# EAGLE board controller01_potboard (EAGLE 9.6.2)
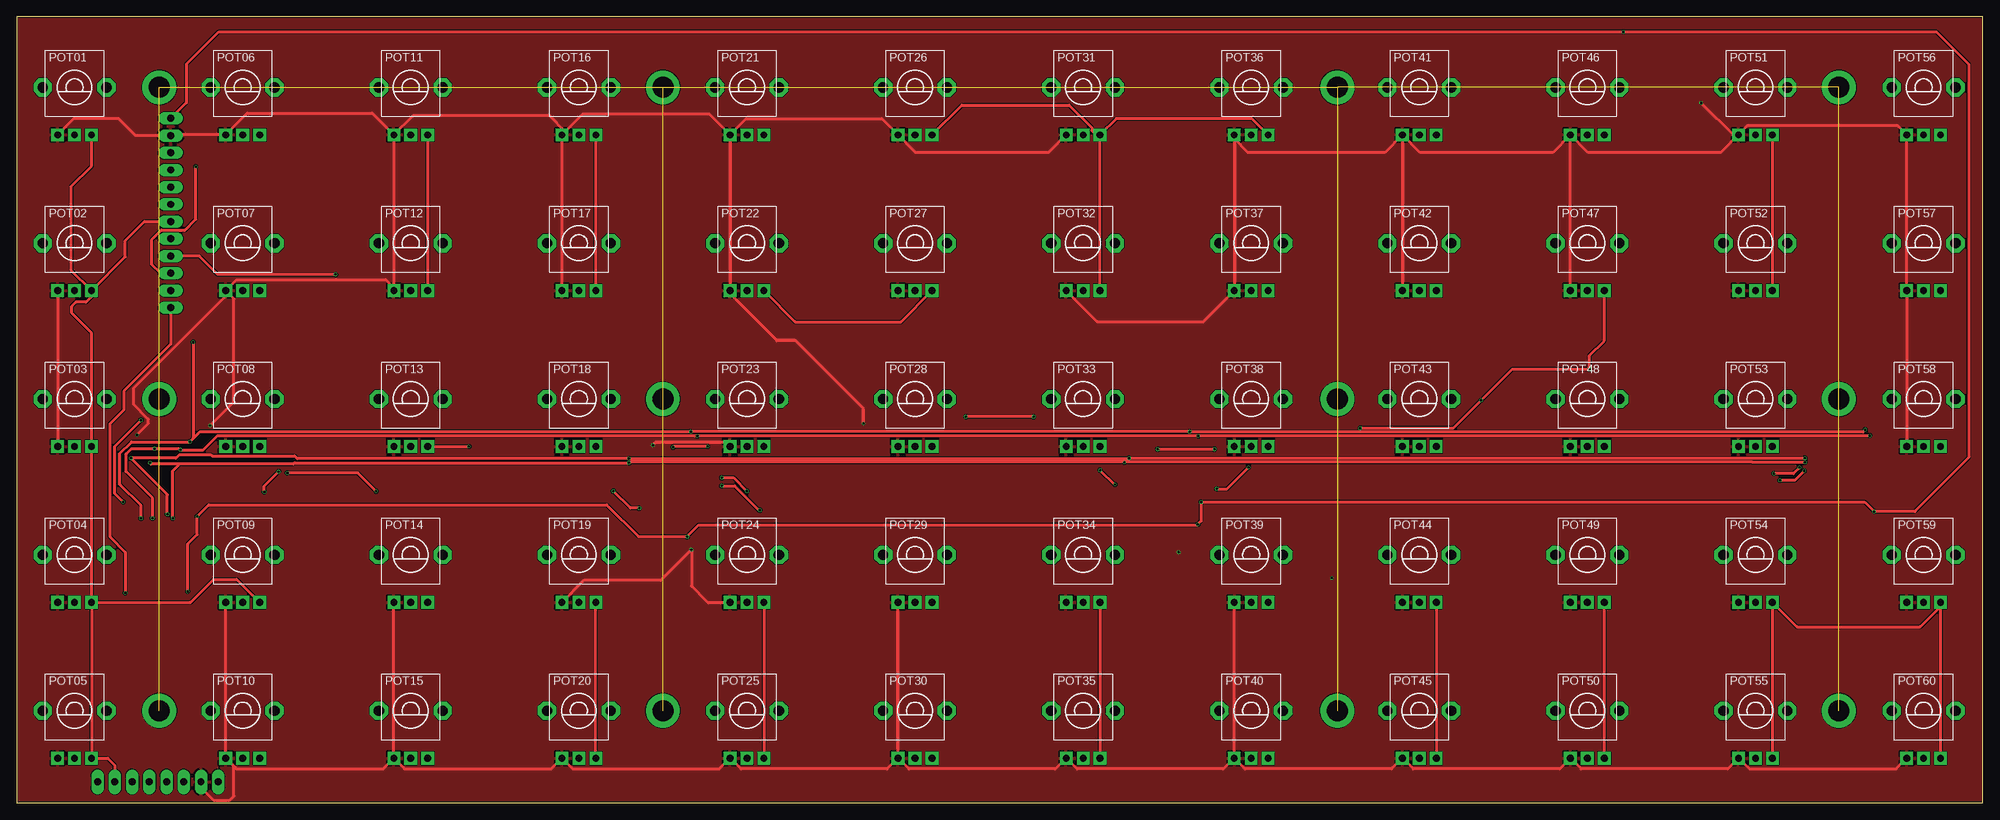
[diagram p0: board, top side]
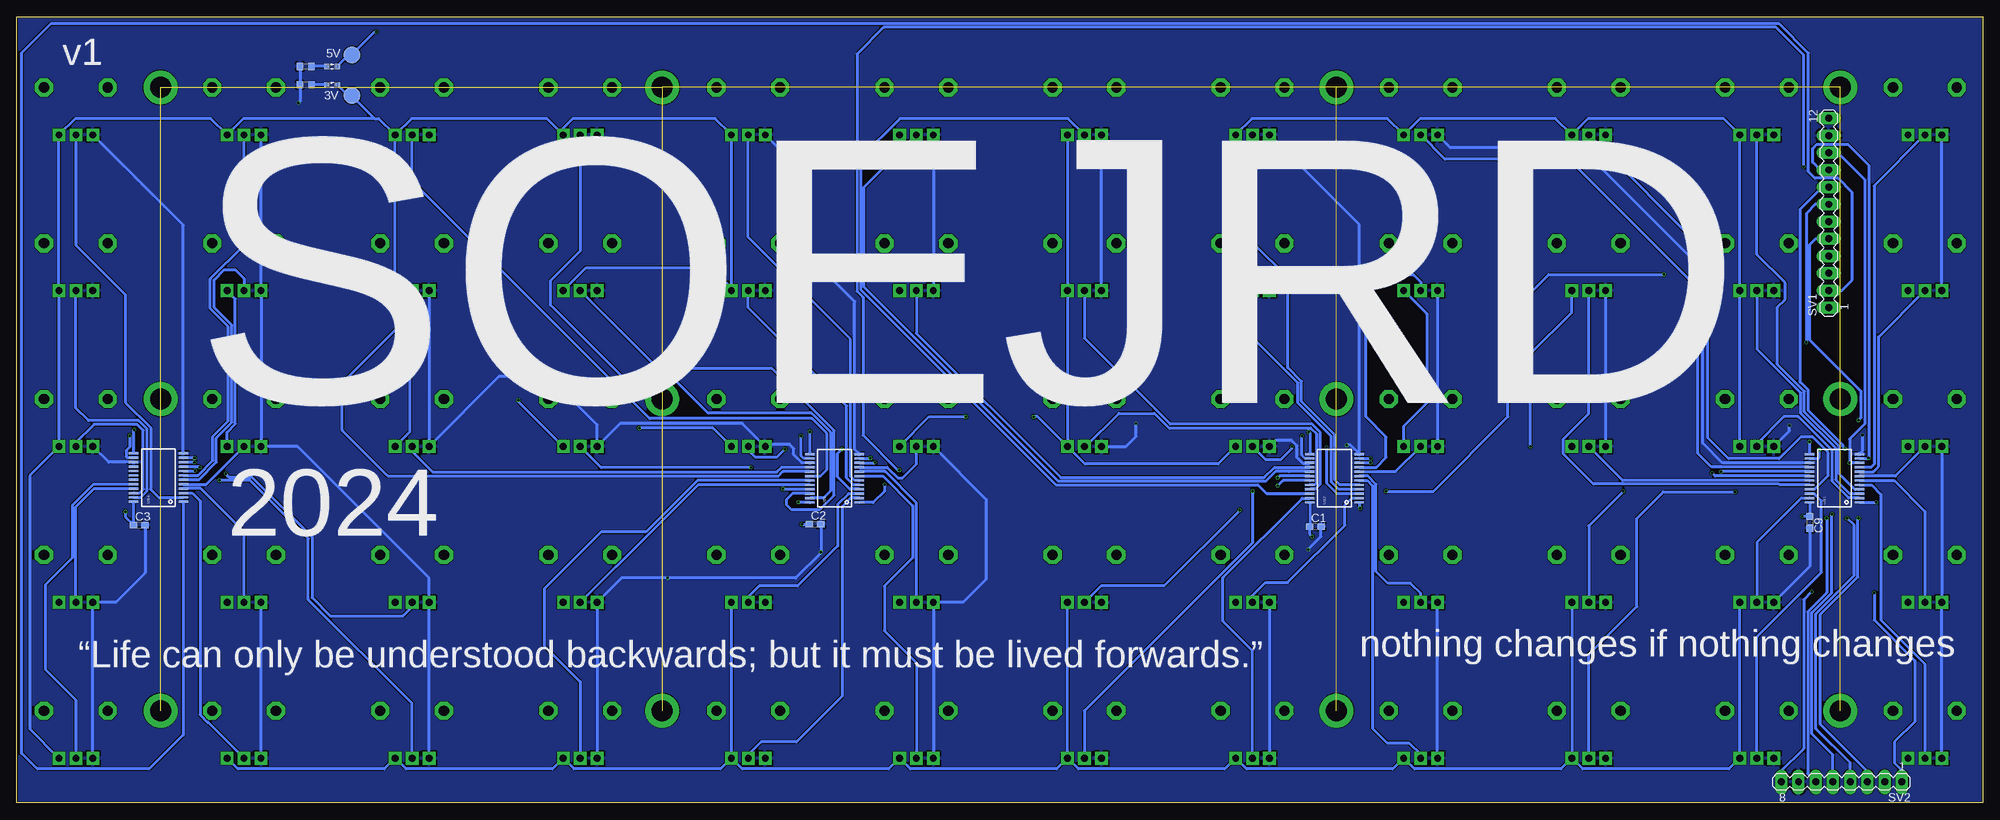
[diagram p1: board, bottom side, seen from below]

Size 290 x 116 mm. Coordinates in mm from the lower left corner, seen from the top.
Outline: 0,0 290,0 290,116 0,116 0,0
Copper layers (1*16): Top 0.035mm / dielectric 1.6mm / Bottom 0.035mm
Design rules "jlcpcb-2layers": minimum track width 5mil, minimum drill 0.3mm, track to track 5mil, track to pad 5mil, pad to pad 5mil, via to via 5mil, smd to smd 5mil, copper to edge 0.2mm, drill to drill 6mil, minimum pad ring 10mil, minimum via ring 3mil, stop-mask expansion 4mil, vias tented up to drill 0mil, thermal gap 10mil

## Footprints (pad centres in the part's own frame; a part is rotated, then mirrored left to right if it is on the bottom)
SML0603 = smd 0.8 x 0.8: A 0.75,0; C -0.75,0
C0603 = smd 1.1 x 1: 1 -0.85,0; 2 0.85,0
ALPS_POT_VERTICAL_PS = drill 1 pad 1.88 square: P$1 -2.5,7; P$2 0,7; P$3 2.5,7 | drill 1.5 pad 2.54 octagon: P$4 -4.7,0; P$5 4.7,0
R0603 = smd 1 x 1.1: 1 -0.85,0; 2 0.85,0
MA12-1 = drill 1.016 long: 1 -13.97,0; 2 -11.43,0; 3 -8.89,0; 4 -6.35,0; 5 -3.81,0; 6 -1.27,0; 7 1.27,0; 8 3.81,0; 9 6.35,0; 10 8.89,0; 11 11.43,0; 12 13.97,0
MA08-1 = drill 1.016 long: 1 -8.89,0; 2 -6.35,0; 3 -3.81,0; 4 -1.27,0; 5 1.27,0; 6 3.81,0; 7 6.35,0; 8 8.89,0
B2,54 = smd 2.54 x 2.54: TP 0,0
SSOP24 = smd 0.348 x 1.397: 1 -3.575,-3.656; 2 -2.925,-3.656; 3 -2.275,-3.656; 4 -1.625,-3.656; 5 -0.975,-3.656; 6 -0.325,-3.656; 7 0.325,-3.656; 8 0.975,-3.656; 9 1.625,-3.656; 10 2.275,-3.656; 11 2.925,-3.656; 12 3.575,-3.656; 13 3.575,3.656; 14 2.925,3.656; 15 2.275,3.656; 16 1.625,3.656; 17 0.975,3.656; 18 0.325,3.656; 19 -0.325,3.656; 20 -0.975,3.656; 21 -1.625,3.656; 22 -2.275,3.656; 23 -2.925,3.656; 24 -3.575,3.656

## Placement (x,y rotation side)
3V  [SML0603]  243.5,106 0 bottom
5V  [SML0603]  243.5,108.7 0 bottom
C1  100n  [C0603]  98.43,40.78 0 bottom
C2  100n  [C0603]  172.23,41.14 0 bottom
C3  100n  [C0603]  271.93,41 0 bottom
C9  100n  [C0603]  25.48,41.43 270 bottom
POT01  10kB  [ALPS_POT_VERTICAL_PS]  8.5,105.6 180 top
POT02  10kB  [ALPS_POT_VERTICAL_PS]  8.5,82.6 180 top
POT03  10kB  [ALPS_POT_VERTICAL_PS]  8.5,59.6 180 top
POT04  10kB  [ALPS_POT_VERTICAL_PS]  8.5,36.6 180 top
POT05  10kB  [ALPS_POT_VERTICAL_PS]  8.5,13.6 180 top
POT06  10kB  [ALPS_POT_VERTICAL_PS]  33.3,105.6 180 top
POT07  10kB  [ALPS_POT_VERTICAL_PS]  33.3,82.6 180 top
POT08  10kB  [ALPS_POT_VERTICAL_PS]  33.3,59.6 180 top
POT09  10kB  [ALPS_POT_VERTICAL_PS]  33.3,36.6 180 top
POT10  10kB  [ALPS_POT_VERTICAL_PS]  33.3,13.6 180 top
POT11  10kB  [ALPS_POT_VERTICAL_PS]  58.1,105.6 180 top
POT12  10kB  [ALPS_POT_VERTICAL_PS]  58.1,82.6 180 top
POT13  10kB  [ALPS_POT_VERTICAL_PS]  58.1,59.6 180 top
POT14  10kB  [ALPS_POT_VERTICAL_PS]  58.1,36.6 180 top
POT15  10kB  [ALPS_POT_VERTICAL_PS]  58.1,13.6 180 top
POT16  10kB  [ALPS_POT_VERTICAL_PS]  82.9,105.6 180 top
POT17  10kB  [ALPS_POT_VERTICAL_PS]  82.9,82.6 180 top
POT18  10kB  [ALPS_POT_VERTICAL_PS]  82.9,59.6 180 top
POT19  10kB  [ALPS_POT_VERTICAL_PS]  82.9,36.6 180 top
POT20  10kB  [ALPS_POT_VERTICAL_PS]  82.9,13.6 180 top
POT21  10kB  [ALPS_POT_VERTICAL_PS]  107.7,105.6 180 top
POT22  10kB  [ALPS_POT_VERTICAL_PS]  107.7,82.6 180 top
POT23  10kB  [ALPS_POT_VERTICAL_PS]  107.7,59.6 180 top
POT24  10kB  [ALPS_POT_VERTICAL_PS]  107.7,36.6 180 top
POT25  10kB  [ALPS_POT_VERTICAL_PS]  107.7,13.6 180 top
POT26  10kB  [ALPS_POT_VERTICAL_PS]  132.5,105.6 180 top
POT27  10kB  [ALPS_POT_VERTICAL_PS]  132.5,82.6 180 top
POT28  10kB  [ALPS_POT_VERTICAL_PS]  132.5,59.6 180 top
POT29  10kB  [ALPS_POT_VERTICAL_PS]  132.5,36.6 180 top
POT30  10kB  [ALPS_POT_VERTICAL_PS]  132.5,13.6 180 top
POT31  10kB  [ALPS_POT_VERTICAL_PS]  157.3,105.6 180 top
POT32  10kB  [ALPS_POT_VERTICAL_PS]  157.3,82.6 180 top
POT33  10kB  [ALPS_POT_VERTICAL_PS]  157.3,59.6 180 top
POT34  10kB  [ALPS_POT_VERTICAL_PS]  157.3,36.6 180 top
POT35  10kB  [ALPS_POT_VERTICAL_PS]  157.3,13.6 180 top
POT36  10kB  [ALPS_POT_VERTICAL_PS]  182.1,105.6 180 top
POT37  10kB  [ALPS_POT_VERTICAL_PS]  182.1,82.6 180 top
POT38  10kB  [ALPS_POT_VERTICAL_PS]  182.1,59.6 180 top
POT39  10kB  [ALPS_POT_VERTICAL_PS]  182.1,36.6 180 top
POT40  10kB  [ALPS_POT_VERTICAL_PS]  182.1,13.6 180 top
POT41  10kB  [ALPS_POT_VERTICAL_PS]  206.9,105.6 180 top
POT42  10kB  [ALPS_POT_VERTICAL_PS]  206.9,82.6 180 top
POT43  10kB  [ALPS_POT_VERTICAL_PS]  206.9,59.6 180 top
POT44  10kB  [ALPS_POT_VERTICAL_PS]  206.9,36.6 180 top
POT45  10kB  [ALPS_POT_VERTICAL_PS]  206.9,13.6 180 top
POT46  10kB  [ALPS_POT_VERTICAL_PS]  231.7,105.6 180 top
POT47  10kB  [ALPS_POT_VERTICAL_PS]  231.7,82.6 180 top
POT48  10kB  [ALPS_POT_VERTICAL_PS]  231.7,59.6 180 top
POT49  10kB  [ALPS_POT_VERTICAL_PS]  231.7,36.6 180 top
POT50  10kB  [ALPS_POT_VERTICAL_PS]  231.7,13.6 180 top
POT51  10kB  [ALPS_POT_VERTICAL_PS]  256.5,105.6 180 top
POT52  10kB  [ALPS_POT_VERTICAL_PS]  256.5,82.6 180 top
POT53  10kB  [ALPS_POT_VERTICAL_PS]  256.5,59.6 180 top
POT54  10kB  [ALPS_POT_VERTICAL_PS]  256.5,36.6 180 top
POT55  10kB  [ALPS_POT_VERTICAL_PS]  256.5,13.6 180 top
POT56  10kB  [ALPS_POT_VERTICAL_PS]  281.3,105.6 180 top
POT57  10kB  [ALPS_POT_VERTICAL_PS]  281.3,82.6 180 top
POT58  10kB  [ALPS_POT_VERTICAL_PS]  281.3,59.6 180 top
POT59  10kB  [ALPS_POT_VERTICAL_PS]  281.3,36.6 180 top
POT60  10kB  [ALPS_POT_VERTICAL_PS]  281.3,13.6 180 top
R1  1k  [R0603]  247.4,108.7 0 bottom
R2  1k  [R0603]  247.4,106 0 bottom
SV1  [MA12-1]  22.69,87.07 90 bottom
SV2  [MA08-1]  20.8,3.1 180 bottom
TP_5V  TPB2,54  [B2,54]  240.6,110.4 0 bottom
TV_3V3  TPB2,54  [B2,54]  240.6,104.4 0 bottom
U$1  MUX-74HC4067SMD  [SSOP24]  21.84,47.91 90 bottom
U$2  MUX-74HC4067SMD  [SSOP24]  95.6,47.91 90 bottom
U$3  MUX-74HC4067SMD  [SSOP24]  169.36,47.91 90 bottom
U$4  MUX-74HC4067SMD  [SSOP24]  269.12,48.01 90 bottom

## Library data of the parts
3V 5V = led
C1-C3 C9 = rcl
POT01-POT09 POT10-POT60 = og-pots
R1 R2 = rcl; SPICEPREFIX: R
SV1 SV2 = con-lstb; OC_FARNELL: unknown; OC_NEWARK: unknown
TP_5V TV_3V3 = testpad
U$1-U$4 = SparkFun-AnalogIC

## Nets
+3V3_A: 3V.A POT01.P$1 POT02.P$1 POT03.P$1 POT04.P$1 POT05.P$1 POT06.P$1 POT07.P$1 POT08.P$1 POT09.P$1 POT10.P$1 POT11.P$1 POT12.P$1 POT13.P$1 POT14.P$1 POT15.P$1 POT16.P$1 POT17.P$1 POT18.P$1 POT19.P$1 POT20.P$1 POT21.P$1 POT22.P$1 POT23.P$1 POT24.P$1 POT25.P$1 POT26.P$1 POT27.P$1 POT28.P$1 POT29.P$1 POT30.P$1 POT31.P$1 POT32.P$1 POT33.P$1 POT34.P$1 POT35.P$1 POT36.P$1 POT37.P$1 POT38.P$1 POT39.P$1 POT40.P$1 POT41.P$1 POT42.P$1 POT43.P$1 POT44.P$1 POT45.P$1 POT46.P$1 POT47.P$1 POT48.P$1 POT49.P$1 POT50.P$1 POT51.P$1 POT52.P$1 POT53.P$1 POT54.P$1 POT55.P$1 POT56.P$1 POT57.P$1 POT58.P$1 POT59.P$1 POT60.P$1 SV1.6 SV2.2 TV_3V3.TP
+5V: 5V.A C1.1 C2.1 C3.1 C9.1 SV1.12 SV2.8 TP_5V.TP U$1.24 U$2.24 U$3.24 U$4.24
COM1: SV1.5 U$1.1
COM2: SV1.4 U$2.1
COM3: SV1.3 U$3.1
COM4: SV1.2 U$4.1
COM5: SV1.1 SV2.1
GND: C1.2 C2.2 C3.2 C9.2 POT01.P$3 POT02.P$3 POT03.P$3 POT04.P$3 POT05.P$3 POT06.P$3 POT07.P$3 POT08.P$3 POT09.P$3 POT10.P$3 POT11.P$3 POT12.P$3 POT13.P$3 POT14.P$3 POT15.P$3 POT16.P$3 POT17.P$3 POT18.P$3 POT19.P$3 POT20.P$3 POT21.P$3 POT22.P$3 POT23.P$3 POT24.P$3 POT25.P$3 POT26.P$3 POT27.P$3 POT28.P$3 POT29.P$3 POT30.P$3 POT31.P$3 POT32.P$3 POT33.P$3 POT34.P$3 POT35.P$3 POT36.P$3 POT37.P$3 POT38.P$3 POT39.P$3 POT40.P$3 POT41.P$3 POT42.P$3 POT43.P$3 POT44.P$3 POT45.P$3 POT46.P$3 POT47.P$3 POT48.P$3 POT49.P$3 POT50.P$3 POT51.P$3 POT52.P$3 POT53.P$3 POT54.P$3 POT55.P$3 POT56.P$3 POT57.P$3 POT58.P$3 POT59.P$3 POT60.P$3 R1.1 R2.1 SV1.11 SV2.7 U$1.12 U$1.15 U$2.12 U$2.15 U$3.12 U$3.15 U$4.12 U$4.15
N$1: 5V.C R1.2
N$2: 3V.C R2.2
POT1A: POT01.P$2 U$1.9
POT1B: POT02.P$2 U$1.8
POT1C: POT03.P$2 U$1.7
POT1D: POT04.P$2 U$1.6
POT1E: POT05.P$2 U$1.5
POT2A: POT06.P$2 U$1.4
POT2B: POT07.P$2 U$1.3
POT2C: POT08.P$2 U$1.2
POT2D: POT09.P$2 U$1.23
POT2E: POT10.P$2 U$1.22
POT3A: POT11.P$2 U$1.21
POT3B: POT12.P$2 U$1.20
POT3C: POT13.P$2 U$1.19
POT3D: POT14.P$2 U$1.18
POT3E: POT15.P$2 U$1.17
POT4A: POT16.P$2 U$1.16
POT4B: POT17.P$2 U$2.9
POT4C: POT18.P$2 U$2.8
POT4D: POT19.P$2 U$2.7
POT4E: POT20.P$2 U$2.6
POT5A: POT21.P$2 U$2.5
POT5B: POT22.P$2 U$2.4
POT5C: POT23.P$2 U$2.3
POT5D: POT24.P$2 U$2.2
POT5E: POT25.P$2 U$2.23
POT6A: POT26.P$2 U$2.22
POT6B: POT27.P$2 U$2.21
POT6C: POT28.P$2 U$2.20
POT6D: POT29.P$2 U$2.19
POT6E: POT30.P$2 U$2.18
POT7A: POT31.P$2 U$2.17
POT7B: POT32.P$2 U$2.16
POT7C: POT33.P$2 U$3.9
POT7D: POT34.P$2 U$3.8
POT7E: POT35.P$2 U$3.7
POT8A: POT36.P$2 U$3.6
POT8B: POT37.P$2 U$3.5
POT8C: POT38.P$2 U$3.4
POT8D: POT39.P$2 U$3.3
POT8E: POT40.P$2 U$3.2
POT9A: POT41.P$2 U$3.23
POT9B: POT42.P$2 U$3.22
POT9C: POT43.P$2 U$3.21
POT9D: POT44.P$2 U$3.20
POT9E: POT45.P$2 U$3.19
POT10A: POT46.P$2 U$3.18
POT10B: POT47.P$2 U$3.17
POT10C: POT48.P$2 U$3.16
POT10D: POT49.P$2 U$4.9
POT10E: POT50.P$2 U$4.8
POT11A: POT51.P$2 U$4.7
POT11B: POT52.P$2 U$4.6
POT11C: POT53.P$2 U$4.5
POT11D: POT54.P$2 U$4.4
POT11E: POT55.P$2 U$4.3
POT12A: POT56.P$2 U$4.2
POT12B: POT57.P$2 U$4.23
POT12C: POT58.P$2 U$4.22
POT12D: POT59.P$2 U$4.21
POT12E: POT60.P$2 U$4.20
S0: SV1.10 SV2.6 U$1.10 U$2.10 U$3.10 U$4.10
S1: SV1.9 SV2.5 U$1.11 U$2.11 U$3.11 U$4.11
S2: SV1.8 SV2.4 U$1.14 U$2.14 U$3.14 U$4.14
S3: SV1.7 SV2.3 U$1.13 U$2.13 U$3.13 U$4.13

## Tracks (layer width: path | path; a pad name or v marks a point on that pad's centre or on a via)
+3V3_A  (via drill 0.35)
  Top 0.406: POT01.P$1 11,94 8,91 8,78.6 POT02.P$1 | POT11.P$1 POT12.P$1 | POT32.P$1 159.8,98 | 159.8,98 POT31.P$1 162.2,101 182.2,101 POT36.P$1 | POT51.P$1 POT52.P$1 | POT47.P$1 234.2,68.2 232,66 v232,64 220.6,64 v216,59.4 211.91,55.31 v198.2,55.31 | POT02.P$1 11,74.7 10.2,73.9 8.7,73.9 8.12,73.32 8.12,72.26 11,69.38 POT03.P$1 POT04.P$1 | POT04.P$1 POT05.P$1 13.4,6.6 14.45,5.55 SV2.2 | POT60.P$1 283.8,29 | 283.8,29 POT59.P$1 | POT55.P$1 POT54.P$1 262.6,26 280.8,26 283.8,29 | POT50.P$1 POT49.P$1 | POT44.P$1 POT45.P$1 | POT34.P$1 POT35.P$1 | POT20.P$1 POT19.P$1 | POT16.P$1 POT17.P$1 | POT13.P$1 v66.7,52.6 | POT24.P$1 POT25.P$1 | POT26.P$1 139.4,103 155.25,103 158.57,99.68 158.57,99.23 159.8,98 | POT22.P$1 114.8,71 130.4,71 POT27.P$1 | v150,57 v140,57 | POT02.P$1 16,80.6 16,83 18.8,85.8 SV1.6 | POT04.P$1 25.6,29.6 29,33 32.4,33 POT09.P$1
  Bottom 0.406: POT46.P$1 231.8,101 211.8,101 POT41.P$1 209.4,99.6 208,101 187,101 POT36.P$1 184.6,76 | POT46.P$1 236.6,101 237.2,101 | 237.2,101 256.6,101 POT51.P$1 261.4,101 281.4,101 POT56.P$1 POT57.P$1 POT58.P$1 288.1,48.3 288.1,10.9 POT60.P$1 | POT40.P$1 POT39.P$1 | POT30.P$1 POT29.P$1 | POT14.P$1 POT15.P$1 | POT08.P$1 POT07.P$1 POT06.P$1 38.2,101 58.2,101 POT11.P$1 63,101 83,101 POT16.P$1 87.8,101 107.8,101 POT21.P$1 POT22.P$1 | POT47.P$1 POT46.P$1 | POT37.P$1 184.6,76 | POT42.P$1 206,79 187.6,79 184.6,76 | POT26.P$1 POT27.P$1 POT28.P$1 | POT48.P$1 232,54.8 v232,64 | POT15.P$1 59,5 37.4,5 POT10.P$1 POT09.P$1 | POT15.P$1 62.2,5 83.8,5 POT20.P$1 87,5 108.6,5 POT25.P$1 111.8,5 133.4,5 POT30.P$1 | POT30.P$1 136.6,5 158.2,5 POT35.P$1 161.4,5 183,5 POT40.P$1 | POT40.P$1 186.2,5 207.8,5 POT45.P$1 211,5 232.6,5 POT50.P$1 235.8,5 257.4,5 POT55.P$1 | POT53.P$1 259,54.69 257.77,55.93 257.77,74.37 POT52.P$1 | POT18.P$1 85.4,55.6 82,59 82,72.2 POT17.P$1 | v66.7,52.6 66.7,66.3 60.6,72.4 POT12.P$1 | POT23.P$1 112.8,50 132.4,50 POT28.P$1 | POT43.P$1 216,59.2 v216,59.4 | POT38.P$1 187.31,55.31 v198.2,55.31 | POT33.P$1 155.4,57 v150,57 | POT28.P$1 139.4,57 v140,57 | 3V.A 241.15,104.4 TV_3V3.TP 237.2,101
+5V  (via drill 0.35)
  Top 0.406: SV1.12 24.99,103.34 24.99,108.99 29.8,113.8 v237,113.8 283.2,113.8 288,109 288,51 280,43 v274,43 272.6,44.4 v174.7,44.4 174.7,41.6 v174.2,41.1 174.1,41 100.6,41 v98.9,39.3 91.7,39.3 87,44 28.32,44 v26.6,42.28 26.6,39.6 25.2,38.2 v25.2,31.2
  Bottom 0.406: U$4.24 C3.1 274,42.22 v274,43 | U$3.24 174.63,44.33 v174.7,44.4 | v174.2,41.1 173.12,41.1 C2.1 | U$2.24 99.26,40.8 | 99.26,40.8 C1.1 | v26.6,42.28 C9.1 25.5,42.3 U$1.24 | v98.9,39.3 99.26,39.66 99.26,40.8 | 5V.A 241.05,110.4 TP_5V.TP 237.2,113.8 v237,113.8 | SV2.8 29.69,4.71 26.4,8 26.4,30 v25.2,31.2
COM1  (via drill 0.35)
  Top 0.406: v15.69,44.4 14.4,45.69 14.4,52.6 v18.3,56.5
  Bottom 0.406: U$1.1 15.75,44.33 v15.69,44.4 | v18.3,56.5 18,56.8 18,60.82 25.47,68.29 25.47,82.42 24.62,83.26 SV1.5
COM2  (via drill 0.35)
  Top 0.406: v91.8,43.5 90.5,43.5 v88,46 | v47,78 29.61,78 26.89,80.72 SV1.4
  Bottom 0.406: U$2.1 91.94,43.64 v91.8,43.5 | v88,46 81,46 70,57 70,72 64,78 v47,78
COM3  (via drill 0.35)
  Top 0.406: SV1.3 21.2,78.18 19.9,79.48 19.9,83.15 21.31,84.56 24.82,84.56 26.4,86.13 v26.4,93.9 | v159.8,49.1 161.9,47 v162,47
  Bottom 0.406: v26.4,93.9 26.42,93.92 26.42,110.42 30.47,114.47 162.13,114.47 166.07,110.53 166.07,75.51 165.2,74.65 165.2,54.27 160.03,49.1 v159.8,49.1 | v162,47 162,46 163.66,44.33 U$3.1
COM4
  Bottom 0.406: U$4.1 265.46,10.04 270.5,5 287,5 289.3,7.3 289.3,110.7 285,115 30,115 25.68,110.68 25.68,93.14 24.72,92.18 21.31,92.18 19.23,90.1 19.23,77.16 20.75,75.64 SV1.2
COM5  (via drill 0.35)
  Top 0.406: SV1.1 22.69,67.69 15.78,60.78 15.78,58 13.7,55.92 13.7,39.3 16,37 v16,31
  Bottom 0.406: v16,31 16,27 10,21 10,12 13,9 13,5.89 11.91,4.8 SV2.1
GND  (via drill 0.35)
  Top 0.406: POT01.P$3 8.4,101 15,101 17.5,98.5 SV1.11 22.79,98.6 POT06.P$3 34,101.8 52.4,101.8 POT11.P$3 | POT11.P$3 55.6,76 | 55.6,76 POT12.P$3 | POT17.P$3 POT16.P$3 80.9,99.1 | POT21.P$3 POT22.P$3 105.2,75.15 112.12,68.23 114.87,68.23 124.9,58.2 v124.9,56 | POT36.P$3 179.6,98 | 179.6,98 POT37.P$3 175,71 159.4,71 POT32.P$3 | POT41.P$3 POT42.P$3 | POT47.P$3 POT46.P$3 | POT58.P$3 POT57.P$3 POT56.P$3 277.4,100 255.4,100 POT51.P$3 | POT21.P$3 107.6,101 127.6,101 POT26.P$3 132.6,96 152.2,96 POT31.P$3 | POT10.P$3 POT09.P$3 | POT51.P$3 251.4,96 231.8,96 POT46.P$3 | POT46.P$3 226.6,96 207,96 POT41.P$3 | POT41.P$3 201.8,96 181.6,96 179.6,98 | 80.9,99.1 83.5,101.7 102.1,101.7 POT21.P$3 | POT11.P$3 58.5,101.5 78.5,101.5 80.9,99.1 | v28.5,55.7 32,59.2 32,74.4 POT07.P$3 | POT07.P$3 32.4,77.2 54.4,77.2 55.6,76 | POT40.P$3 POT39.P$3 | POT30.P$3 POT29.P$3 | POT60.P$3 277.2,5 255.6,5 POT55.P$3 252.4,5 230.8,5 POT50.P$3 227.6,5 206,5 POT45.P$3 202.8,5 181.2,5 POT40.P$3 | POT40.P$3 178,5 156.4,5 POT35.P$3 153.2,5 131.6,5 POT30.P$3 | POT30.P$3 128.4,5 106.8,5 POT25.P$3 103.6,5 82,5 POT20.P$3 78.8,5 57.2,5 POT15.P$3 | POT24.P$3 101.9,29.6 99.5,32 v99.5,37.4 95,32.9 83.7,32.9 POT19.P$3 | POT15.P$3 POT14.P$3 | POT23.P$3 104.62,53.18 94.18,53.18 v93.8,52.8 | v17.7,54.3 19.4,56 19.4,56.6 17.2,58.8 17.2,61.2 30.8,74.8 POT07.P$3 | POT10.P$3 32.4,5 54,5 POT15.P$3 | POT02.P$3 POT03.P$3 | SV2.7 27.15,2.25 29,0.4 31.4,0.4 32,1 32,5.4 POT10.P$3 | v248.5,103.3 253.2,98.6 POT51.P$3
  Bottom 0.406: C9.2 25.48,34.92 POT09.P$3 | POT02.P$3 POT01.P$3 | POT60.P$3 POT59.P$3 275.4,29.6 271.08,33.92 C3.2 | POT55.P$3 POT54.P$3 | POT50.P$3 POT49.P$3 229.2,33.2 248.6,52.6 POT53.P$3 POT52.P$3 POT51.P$3 | POT45.P$3 POT44.P$3 200.8,33.2 v194,33.2 175.1,33.2 171.38,36.92 v171.38,37 C2.2 | POT35.P$3 POT34.P$3 150.4,29.6 147,33 147,44.8 POT33.P$3 | POT24.P$3 POT25.P$3 | POT20.P$3 POT19.P$3 | POT05.P$3 POT04.P$3 POT03.P$3 | POT13.P$3 POT12.P$3 | POT17.P$3 POT18.P$3 | POT47.P$3 POT48.P$3 218.9,62.9 211.5,62.9 204.4,55.8 POT43.P$3 201,56 183,56 POT38.P$3 179.3,52.9 176,52.9 175.4,52.3 175.4,51.4 174.19,50.19 U$3.15 | POT27.P$3 POT26.P$3 | POT31.P$3 POT32.P$3 | U$1.15 38.39,50.19 41.3,53.1 41.3,78.7 59.3,96.7 78.5,96.7 POT16.P$3 | POT08.P$3 28.5,54.9 v28.5,55.7 | C1.2 97.58,39.32 v99.5,37.4 | U$4.15 276.49,50.28 POT58.P$3 | U$4.12 265.46,85.26 POT56.P$3 | U$3.12 166.4,52.18 166.4,74 173,80.6 173,92 POT36.P$3 | U$2.15 99.34,50.1 100.27,50.1 101.13,50.97 101.13,52.7 101.93,53.5 104.3,53.5 POT23.P$3 | POT21.P$3 91.94,85.34 U$2.12 93.26,52.8 v93.8,52.8 | U$1.12 17.7,51.97 v17.7,54.3 | POT28.P$3 126.4,52.6 124.9,54.1 v124.9,56 | R1.1 R2.1 248.25,103.55 v248.5,103.3
  pour Top: -11,111 -11,113 -1,123 293,123 296,120 296,-49 292,-53 -7,-53 -9,-51 -11,-49 -11,110
  pour Bottom: -17,-44 4,-65 155,-65 283,-65 304,-44 304,115 288,131 -8,131 -18,121 -18,-43
N$1
  Bottom 0.406: 5V.C R1.2
N$2
  Bottom 0.406: 3V.C R2.2
N$4856654  (via drill 3.1 pad 5)  (11 unrouted)
  other vias: 21,105.6 21,59.6 21,13.6 95.3,105.6 194.8,105.6 268.8,105.6 268.8,59.6 268.8,13.6 194.8,13.6 194.8,59.6 95.3,59.6 95.3,13.6
POT1A
  Bottom 0.406: POT01.P$2 16,91.1 16,50 16.46,49.53 U$1.9
POT1B
  Bottom 0.406: U$1.8 16.13,48.88 15.34,49.67 15.34,68.76 POT02.P$2
POT1C
  Bottom 0.406: POT03.P$2 12.87,48.23 U$1.7
POT1D
  Bottom 0.406: U$1.6 18.16,47.56 13.04,47.56 8.5,43.03 POT04.P$2
POT1E
  Bottom 0.406: U$1.5 18.14,46.89 16.35,46.89 15,45.54 15,27 8.5,20.5 POT05.P$2
POT2A
  Bottom 0.406: POT06.P$2 33.3,80.95 29.13,76.78 29.13,74.32 30.28,73.17 30.28,64.73 26.27,60.72 26.27,57.72 21.13,52.59 21.13,48.55 18.84,46.26 18.21,46.26 U$1.4
POT2B
  Bottom 0.406: POT07.P$2 33.3,67 26.8,60.5 26.8,57.5 21.67,52.37 21.67,47.67 19.64,45.64 U$1.3
POT2C
  Bottom 0.406: U$1.2 18.2,45 19.76,45 22.2,47.45 22.2,52 27.2,57 29.3,57 33.3,53 POT08.P$2
POT2D
  Bottom 0.406: U$1.23 25.55,45.04 26.73,45.04 33.3,38.47 POT09.P$2
POT2E
  Bottom 0.406: U$1.22 25.48,45.62 24.79,45.62 23.77,44.6 23.77,34.03 33.3,24.5 POT10.P$2
POT3A
  Bottom 0.406: POT11.P$2 40.5,81 40.5,53.85 37.48,50.83 29.99,50.83 26.83,53.99 25.06,53.99 22.77,51.7 22.77,48.32 24.76,46.33 25.45,46.33 U$1.21
POT3B
  Bottom 0.406: POT12.P$2 58.1,57.45 61.87,53.68 61.87,51.52 57.4,47.05 30.05,47.05 29.93,46.94 U$1.20
POT3C
  Bottom 0.406: U$1.19 53.09,47.58 POT13.P$2
POT3D  (via drill 0.35)
  Top 0.406: v39.9,48.7 50.3,48.7 v53,46
  Bottom 0.406: U$1.18 39.44,48.23 v39.9,48.7 | v53,46 58.1,40.9 POT14.P$2
POT3E  (via drill 0.35)
  Top 0.406: v36.5,45.9 36.5,46.8 v38.6,48.9
  Bottom 0.406: U$1.17 38.59,48.89 v38.6,48.9 | POT15.P$2 58.1,21.9 51,29 51,42 47.1,45.9 v36.5,45.9
POT4A
  Bottom 0.406: U$1.16 25.6,49.53 25.64,49.58 39.98,49.58 42,51.6 42,76 61,95 79.3,95 POT16.P$2
POT4B
  Bottom 0.406: U$2.9 89.47,49.53 88,51 88,54 91,57 91,75 88,78 84,78 82.9,76.9 POT17.P$2
POT4C
  Bottom 0.406: U$2.8 86.61,48.89 POT18.P$2
POT4D
  Bottom 0.406: POT19.P$2 82.9,30.9 84.4,32.4 87.7,32.4 89.47,34.17 89.47,47.02 90.68,48.23 U$2.7
POT4E
  Bottom 0.406: U$2.6 90.78,47.58 90,46.8 90,11 87.87,8.87 84.62,8.87 82.9,7.15 POT20.P$2
POT5A
  Bottom 0.406: POT21.P$2 107.7,82.7 102.5,77.5 102.5,64.25 100.47,62.22 100.47,59.22 95.57,54.32 95.57,47.67 94.88,46.98 91.99,46.98 U$2.5
POT5B
  Bottom 0.406: U$2.4 94.98,46.28 96.1,47.4 96.1,54.1 101,59 101,62 107.7,68.7 POT22.P$2
POT5C  (via drill 0.35)
  Top 0.406: v101.9,52.6 96.9,52.6 v96.8,52.5
  Bottom 0.406: POT23.P$2 105.8,50.7 103.5,50.7 101.9,52.3 v101.9,52.6 | v96.8,52.5 96.8,47.2 95.23,45.64 U$2.3
POT5D
  Bottom 0.406: POT24.P$2 107.7,30.6 105.78,32.52 102.52,32.52 94.07,40.97 94.07,43.95 93.03,44.98 U$2.2
POT5E
  Bottom 0.406: U$2.23 99.27,44.97 100.36,44.97 112.07,33.26 112.07,26.82 107.7,22.45 POT25.P$2
POT6A
  Bottom 0.406: POT26.P$2 134.9,101 159.75,101 165.53,95.21 165.53,75.73 136.73,46.93 106.93,46.93 105.64,45.64 U$2.22
POT6B
  Bottom 0.406: U$2.21 99.14,46.4 98.35,46.4 97.69,47.05 97.69,54.65 98.94,55.9 119.82,55.9 132.5,68.58 POT27.P$2
POT6C
  Bottom 0.406: U$2.20 99.21,46.98 98.52,46.98 98.23,47.27 98.23,54.43 99.16,55.36 120.04,55.36 122.18,57.5 127.45,57.5 132.35,52.6 POT28.P$2
POT6D  (via drill 0.35)
  Top 0.406: v104,46.8 105.9,46.8 109.5,43.2 v109.6,43.2
  Bottom 0.406: U$2.19 103.22,47.58 v104,46.8 | POT29.P$2 130,32.1 120.7,32.1 v109.6,43.2
POT6E  (via drill 0.35)
  Top 0.406: v104,48 105.7,48 v107.7,46
  Bottom 0.406: U$2.18 103.77,48.23 v104,48 | v107.7,46 107.7,38.4 132.5,13.6 POT30.P$2
POT7A
  Bottom 0.406: U$2.17 102.28,48.89 102.3,48.9 104.35,48.9 105.78,47.47 136.37,47.47 165,76.1 165,90.9 POT31.P$2
POT7B
  Bottom 0.406: POT32.P$2 157.3,69.3 136,48 106,48 104.47,49.53 U$2.16
POT7C
  Bottom 0.406: U$3.9 161.6,49.53 160,47.94 159.37,47.94 157.3,50 POT33.P$2
POT7D
  Bottom 0.406: POT34.P$2 157.3,44.3 161.88,48.89 U$3.8
POT7E
  Bottom 0.406: U$3.7 162.24,48.23 157.83,43.83 157.83,36.17 162,32 162,25.4 157.3,20.7 POT35.P$2
POT8A
  Bottom 0.406: U$3.6 165.72,47.6 166.41,47.6 167.03,48.22 167.03,68.43 182.1,83.5 POT36.P$2
POT8B
  Bottom 0.406: U$3.5 166.6,46.94 167.6,47.93 167.6,58.6 182.1,73.1 POT37.P$2
POT8C  (via drill 0.35)
  Top 0.406: v168.3,52.2 v176.7,52.2
  Bottom 0.406: U$3.4 165.75,46.33 167.14,46.33 168.9,48.09 168.9,51.6 v168.3,52.2 | v176.7,52.2 177.9,51 181,51 182.1,52.1 POT38.P$2
POT8D
  Bottom 0.406: U$3.3 165.72,45.62 167.34,45.62 168.9,44.05 168.9,37.9 174.8,32 180.5,32 182.1,30.4 POT39.P$2
POT8E
  Bottom 0.406: U$3.2 167.01,44.98 168.3,43.7 168.3,15.7 175,9 180.2,9 182.1,7.1 POT40.P$2
POT9A
  Bottom 0.406: POT41.P$2 206.9,81.45 211.27,77.08 211.27,73.47 200.8,63 193.47,63 188,57.53 172.78,57.53 169.97,54.72 169.97,46.03 171.01,44.98 U$3.23
POT9B
  Bottom 0.406: POT42.P$2 195.38,64.08 178.57,64.08 169.43,54.94 169.43,45.41 171.51,43.33 175.8,43.33 176.5,44.03 176.5,44.74 175.6,45.64 U$3.22
POT9C  (via drill 0.35)
  Top 0.406: v177,46.35 178.55,46.35 v181.7,49.5
  Bottom 0.406: U$3.21 176.93,46.28 v177,46.35 | v181.7,49.5 203.8,49.5 POT43.P$2
POT9D
  Bottom 0.406: POT44.P$2 201.58,34.92 201.5,34.92 189.49,46.94 U$3.20
POT9E
  Bottom 0.406: U$3.19 173.22,47.58 173.23,47.57 189.61,47.57 197.18,40 203.8,40 212.2,31.6 212.2,23.2 206.9,17.9 POT45.P$2
POT10A
  Bottom 0.406: U$3.18 171.47,48.23 170.5,49.2 170.5,54.5 172.7,56.7 196.65,56.7 231.7,91.75 POT46.P$2
POT10B
  Bottom 0.406: U$3.17 177.02,48.89 177.62,48.28 235.28,48.28 242,55 242,62 231.7,72.3 POT47.P$2
POT10C
  Bottom 0.406: U$3.16 177.22,49.53 177.92,48.83 228.63,48.83 231.7,51.9 POT48.P$2
POT10D  (via drill 0.35)
  Top 0.406: v263,49.5 262.1,48.6 v259.2,48.6
  Bottom 0.406: U$4.9 263.13,49.64 v263,49.5 | v259.2,48.6 258.73,48.13 255.38,48.13 246.47,39.22 246.47,30.3 243.8,27.63 233.02,27.63 231.7,28.95 POT49.P$2
POT10E  (via drill 0.35)
  Top 0.406: v263.7,49 262.3,47.6 v260.1,47.6
  Bottom 0.406: U$4.8 263.71,48.98 v263.7,49 | POT50.P$2 231.7,14.7 247,30 247,39 255.6,47.6 v260.1,47.6
POT11A
  Bottom 0.406: U$4.7 263.28,48.33 261.1,50.51 261.1,54.1 258.85,56.35 258.85,70.3 261.47,72.92 261.47,77.38 256.5,82.35 POT51.P$2
POT11B
  Bottom 0.406: U$4.6 265.42,47.73 263.13,47.73 260.57,50.29 260.57,53.88 258.3,56.15 258.3,70.51 260.9,73.11 260.9,77.19 259.4,78.7 257.8,78.7 256.5,77.4 POT52.P$2
POT11C
  Bottom 0.406: U$4.5 262.06,47.03 POT53.P$2
POT11D
  Bottom 0.406: POT54.P$2 256.5,40.02 262.87,46.39 U$4.4
POT11E
  Bottom 0.406: POT55.P$2 261.82,11.92 261.9,11.92 262.98,13 262.98,44.54 264.18,45.73 U$4.3
POT12A
  Bottom 0.406: POT56.P$2 281.3,82.3 274,75 274,59.13 270.28,55.41 270.28,46.28 269.08,45.08 U$4.2
POT12B
  Bottom 0.406: U$4.23 272.76,45.1 271.77,45.1 270.81,46.05 270.81,55.19 272.04,56.42 279.42,56.42 281.3,58.3 POT57.P$2
POT12C
  Bottom 0.406: U$4.22 272.76,45.75 271.87,45.75 271.35,46.27 271.35,54.97 272.26,55.88 278.62,55.88 281.3,53.2 POT58.P$2
POT12D
  Bottom 0.406: POT59.P$2 281.3,43.7 278.62,46.39 U$4.21
POT12E
  Bottom 0.406: U$4.20 272.98,47.03 272.99,47.02 278.74,47.02 281.83,43.92 281.83,36.18 285.8,32.21 285.8,19.7 281.3,15.2 POT60.P$2
S0  (via drill 0.35)
  Top 0.406: v19.6,50.2 19.8,50 24,50 | 24,50 40.78,50 40.98,50.2 v90.3,50.2 90.35,50.25 90.54,50.25 90.59,50.3 163.4,50.3 | v263.8,50.25 256.05,50.25 256,50.3 163.4,50.3 | v163.4,50.25 163.4,50.3 | v23,42 23,49 24,50
  Bottom 0.406: U$1.10 19.59,50.19 v19.6,50.2 19.6,53.7 17.4,55.9 17.4,92 21.36,95.96 SV1.10 | v90.3,50.2 U$2.10 | U$4.10 263.84,50.28 v263.8,50.25 | U$3.10 163.46,50.19 v163.4,50.25 | SV2.6 25.81,4.3 25.81,28.19 23,31 v23,42
S1  (via drill 0.35)
  Top 0.406: 164,50.83 v90.3,50.83 41.35,50.83 40.96,51.22 28.81,51.22 28.64,51.38 23.96,51.38 23.48,50.9 v16.8,50.9 22.2,45.5 v22.2,42.6 | 164,50.83 263.73,50.83 v263.8,50.9 | v164.1,50.88 164.05,50.88 164,50.83
  Bottom 0.406: U$1.11 16.86,50.83 v16.8,50.9 16.77,50.93 16.77,94.11 19.86,97.21 24.42,97.21 25.05,96.58 25.05,94.54 23.93,93.42 SV1.9 | U$2.11 v90.31,50.83 v90.3,50.83 | v263.8,50.9 265.43,50.9 U$4.11 | U$3.11 164.14,50.83 v164.1,50.88 | SV2.5 22.07,7.07 25.2,10.2 25.2,28.05 22.27,30.98 22.27,42.53 v22.2,42.6
S2  (via drill 0.35)
  Top 0.406: 100,54.2 29.6,54.2 27.5,52.1 v24.1,52.1 23.9,52.3 v20.3,52.3 16.9,52.3 16.1,51.5 16.1,48.9 20,45 v20,42 | 100,54.2 174.3,54.2 | 174.3,54.2 v273.36,54.2 | v174.3,54.15 174.3,54.2 | v100.4,54.15 100.05,54.15 100,54.2
  Bottom 0.406: U$1.14 24.16,50.83 24.1,50.9 v24.1,52.1 | U$4.14 272.79,50.95 273.78,50.95 273.9,51.07 273.9,52 273.36,52.54 v273.36,54.2 | U$3.14 173.03,50.85 173.92,50.85 174.3,51.23 v174.3,54.15 | U$2.14 99.66,50.83 99.67,50.85 99.96,50.85 100.4,51.29 v100.4,54.15 | SV1.8 23.62,90.88 26.9,87.6 26.9,62.11 25.73,60.94 25.73,57.94 20.6,52.81 20.6,52.6 v20.3,52.3 | SV2.4 19.53,5.93 24.57,10.97 24.57,27.92 18.93,33.56 18.93,41 19.93,42 v20,42
S3  (via drill 0.35)
  Top 0.406: v272.7,55.1 272.33,54.73 173,54.73 v173,54.78 v99.4,54.78 99.38,54.8 27,54.8 v25.5,53.3 | v26,68 26,53.8 v25.5,53.3 | v18.3,42 18.3,43.9 15.2,47 15.2,51.6 16.9,53.3 v25.5,53.3
  Bottom 0.406: U$1.13 v25.5,53.3 | U$4.13 272.78,55.02 v272.7,55.1 | U$3.13 173.02,54.77 v173,54.78 | U$2.13 99.26,54.64 v99.4,54.78 | SV1.7 24.66,88.34 26,87 v26,68 | SV2.3 16.99,4.64 23.93,11.59 23.93,27.8 18.4,33.34 18.4,41.9 v18.3,42

## Text on the board
bPlace: v1 | SOEJRD | 2024 | nothing changes if nothing changes | “Life can only be understood backwards; but it must be lived forwards.”